# EAGLE board Capacitive (EAGLE 7.2.0)
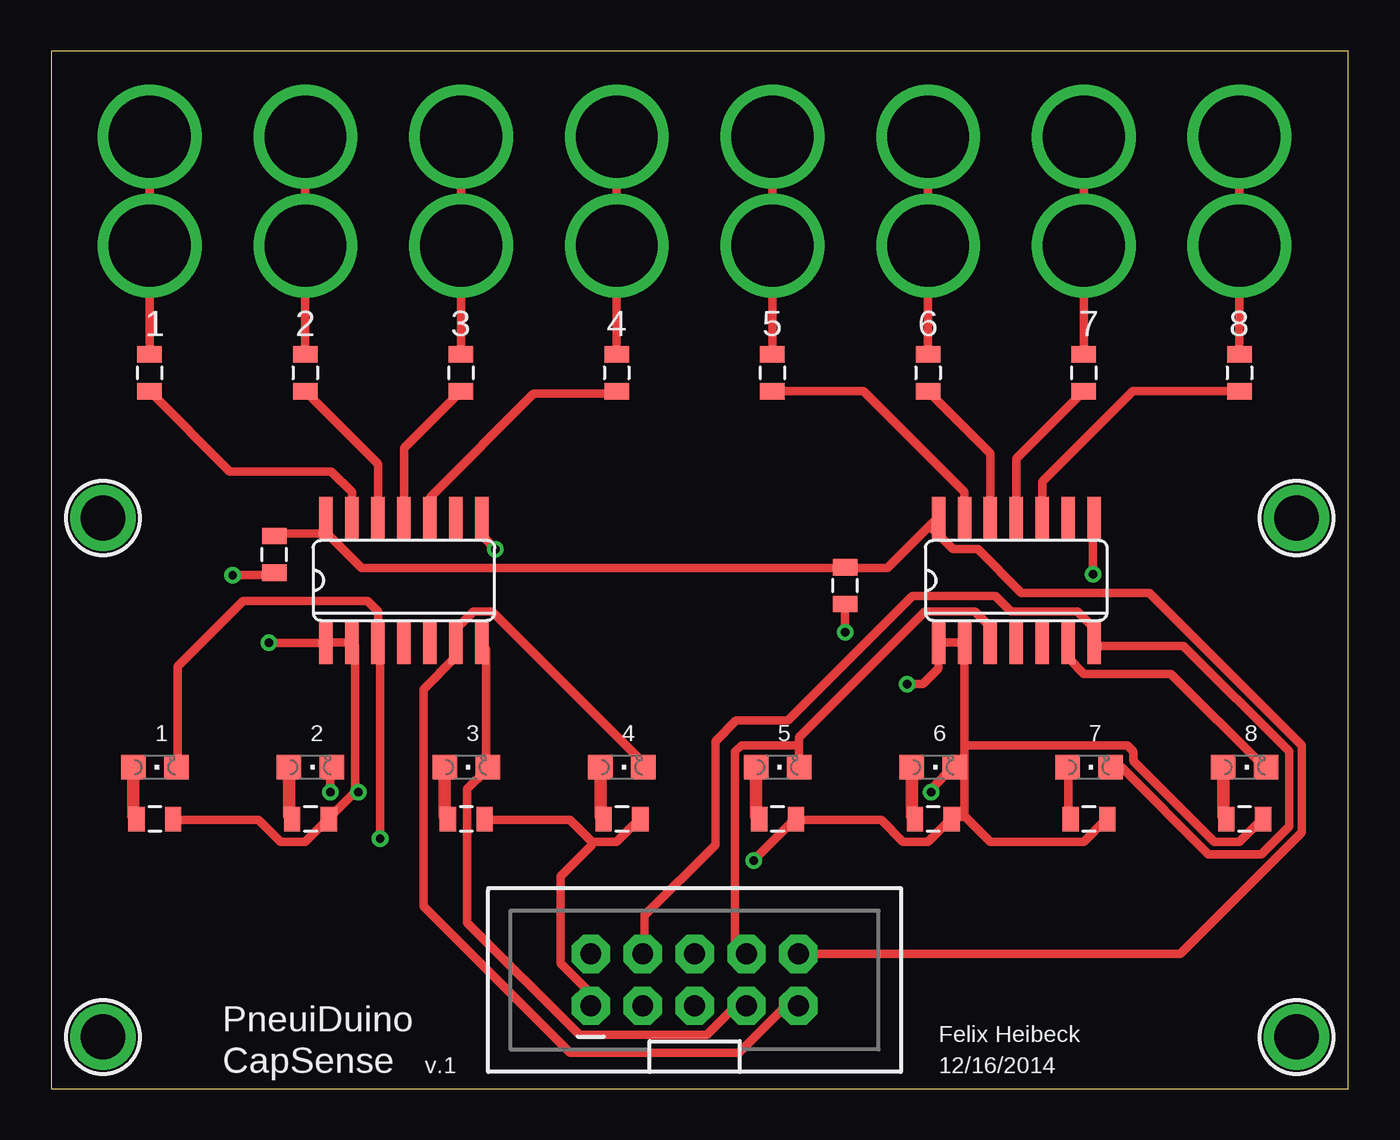
[diagram p0: board, top side]
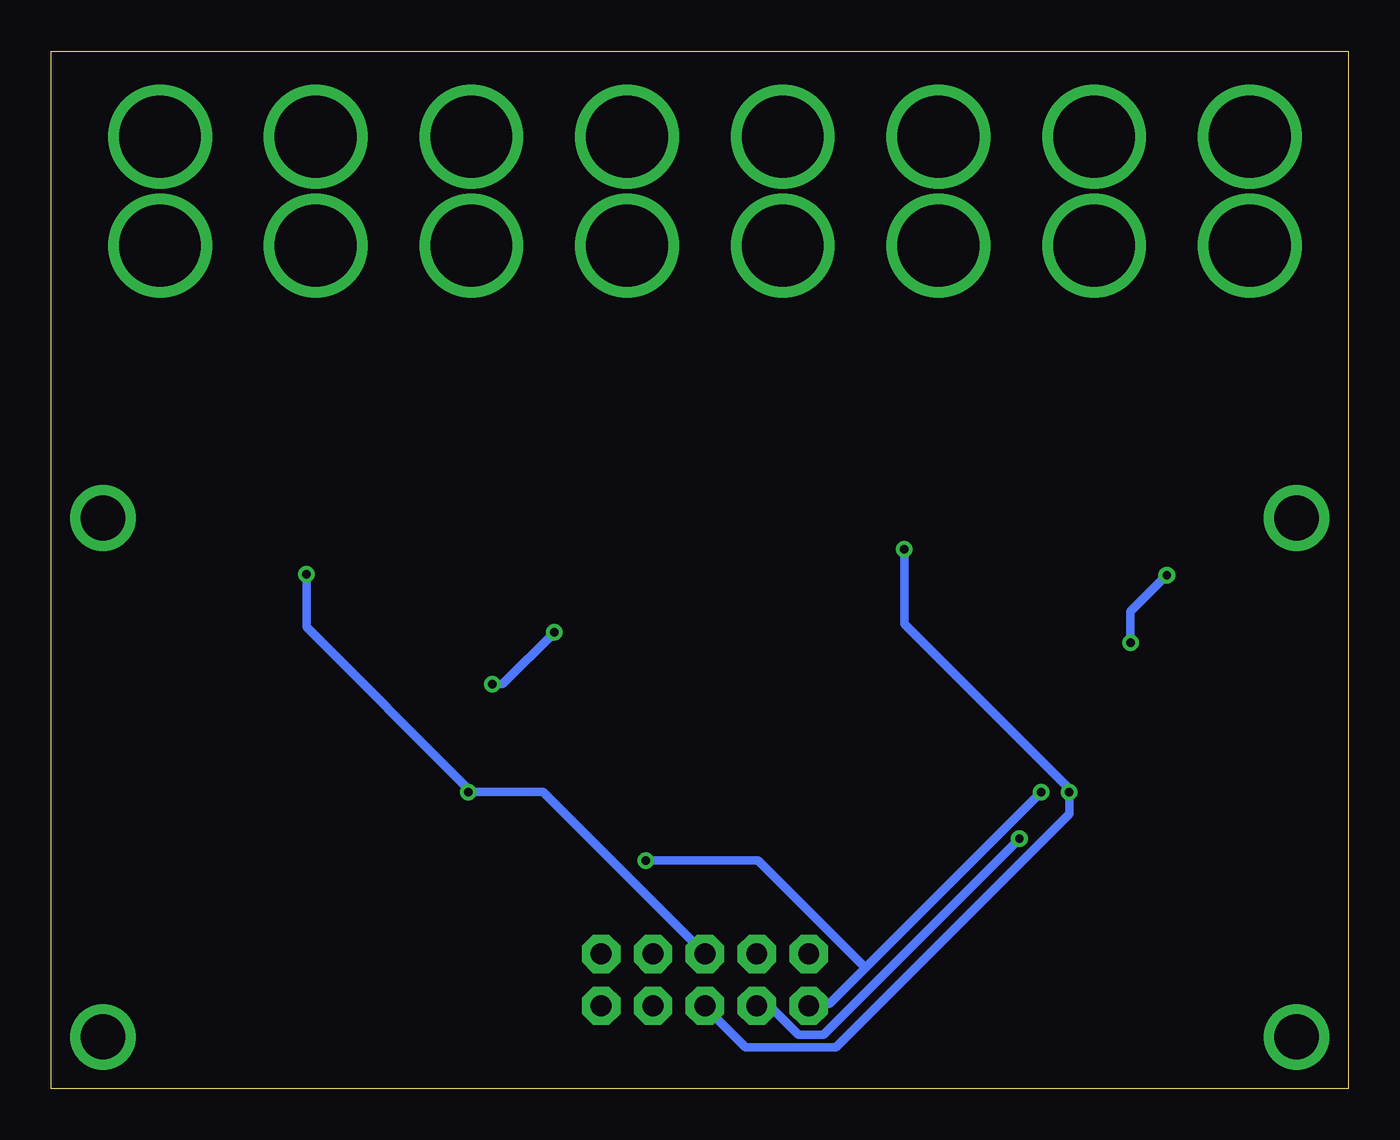
[diagram p1: board, bottom side, seen from below]

Size 63.5 x 50.8 mm. Coordinates in mm from the lower left corner, seen from the top.
Outline: 0,0 63.5,0 63.5,50.8 0,50.8 0,0
Copper layers (1*16): Top 0.035mm / dielectric 1.5mm / Bottom 0.035mm
Design rules "default *": minimum track width 16mil, minimum drill 16mil, track to track 8mil, track to pad 8mil, pad to pad 8mil, via to via 8mil, smd to smd 8mil, copper to edge 40mil, drill to drill 8mil, minimum pad ring 10mil, minimum via ring 8mil, stop-mask expansion 4mil, vias tented up to drill 16mil, thermal gap 10mil
Net classes: 0 default: width 0.203 mm; 1 vcc: width 0.254 mm

## Footprints (pad centres in the part's own frame; a part is rotated, then mirrored left to right if it is on the bottom)
CHIPLED_0805 = smd 1.2 x 1.2: A 0,-1.05; C 0,1.05
0805 = smd 0.8 x 1.2: 1 -0.9,0; 2 0.9,0
SO14 = smd 0.66 x 2.032: 1 -3.81,-3.073; 2 -2.54,-3.073; 3 -1.27,-3.073; 4 0,-3.073; 5 1.27,-3.073; 6 2.54,-3.073; 7 3.81,-3.073; 8 3.81,3.073; 9 2.54,3.073; 10 1.27,3.073; 11 0,3.073; 12 -1.27,3.073; 13 -2.54,3.073; 14 -3.81,3.073
2X5-SHROUDED = drill 1.016 pad 1.88 octagon: 1 -1.27,5.08; 2 1.27,5.08; 3 -1.27,2.54; 4 1.27,2.54; 5 -1.27,0; 6 1.27,0; 7 -1.27,-2.54; 8 1.27,-2.54; 9 -1.27,-5.08; 10 1.27,-5.08
3MM_ALLIGATOR = drill 4 pad 5.08: ALLIGATOR 2.667,0; ALLIGATOR1 -2.667,0
MOUNTINGHOLE_2.0_PLATED = drill 2.2 pad 3: P$1 0,0

## Placement (x,y rotation side)
1  [CHIPLED_0805]  5.08,15.75 270 top
2  [CHIPLED_0805]  12.7,15.75 270 top
3  [CHIPLED_0805]  20.32,15.75 270 top
4  [CHIPLED_0805]  27.94,15.75 270 top
5  [CHIPLED_0805]  35.56,15.75 270 top
6  [CHIPLED_0805]  43.18,15.75 270 top
7  [CHIPLED_0805]  50.8,15.75 270 top
8  [CHIPLED_0805]  58.42,15.75 270 top
C1  0.1uF  [0805]  10.92,26.16 90 top
C2  0.1uF  [0805]  38.86,24.64 90 top
IC1  AT42QT1070  [SO14]  17.27,24.89 0 top
IC2  AT42QT1070  [SO14]  47.24,24.89 0 top
JP4  M05X2SHD  [2X5-SHROUDED]  31.5,5.33 90 top
R1  470  [0805]  5.08,13.21 180 top
R2  470  [0805]  20.32,13.21 180 top
R3  470  [0805]  12.7,13.21 180 top
R4  470  [0805]  27.94,13.21 180 top
R5  470  [0805]  58.42,13.21 180 top
R6  470  [0805]  50.8,13.21 180 top
R7  470  [0805]  43.18,13.21 180 top
R8  470  [0805]  35.56,13.21 180 top
R9  10k  [0805]  4.83,35.05 270 top
R10  10k  [0805]  12.45,35.05 270 top
R11  10k  [0805]  20.07,35.05 270 top
R12  10k  [0805]  27.69,35.05 270 top
R13  10k  [0805]  35.31,35.05 270 top
R14  10k  [0805]  42.93,35.05 270 top
R15  10k  [0805]  50.55,35.05 270 top
R16  10k  [0805]  58.17,35.05 270 top
U$1  ALLIGATOR_CONN  [3MM_ALLIGATOR]  4.83,43.94 270 top
U$2  ALLIGATOR_CONN  [3MM_ALLIGATOR]  12.45,43.94 270 top
U$3  ALLIGATOR_CONN  [3MM_ALLIGATOR]  20.07,43.94 270 top
U$4  ALLIGATOR_CONN  [3MM_ALLIGATOR]  27.69,43.94 270 top
U$5  ALLIGATOR_CONN  [3MM_ALLIGATOR]  35.31,43.94 270 top
U$6  ALLIGATOR_CONN  [3MM_ALLIGATOR]  42.93,43.94 270 top
U$7  ALLIGATOR_CONN  [3MM_ALLIGATOR]  50.55,43.94 270 top
U$8  ALLIGATOR_CONN  [3MM_ALLIGATOR]  58.17,43.94 270 top
U$9  MOUNTINGHOLE2.0  [MOUNTINGHOLE_2.0_PLATED]  60.96,2.54 0 top
U$10  MOUNTINGHOLE2.0  [MOUNTINGHOLE_2.0_PLATED]  2.54,27.94 0 top
U$11  MOUNTINGHOLE2.0  [MOUNTINGHOLE_2.0_PLATED]  2.54,2.54 0 top
U$12  MOUNTINGHOLE2.0  [MOUNTINGHOLE_2.0_PLATED]  60.96,27.94 0 top

## Library data of the parts
1-8 IC1 IC2 = adafruit
C1 C2 = SparkFun-Passives
JP4 = SparkFun-Connectors
R1-R16 = SparkFun-Resistors
U$1-U$8 = digikey
U$9-U$12 = microbuilder; BOM: EXCLUDE

## Nets
5V: C1.1 C2.1 IC1.1 IC1.2 IC2.1 IC2.2 JP4.1 R1.1 R2.1 R3.1 R4.1 R5.1 R6.1 R7.1 R8.1
07: JP4.2
GND [vcc]: C1.2 C2.2 IC1.14 IC2.14 JP4.10
N$1: 1.A R1.2
N$2: 3.A R2.2
N$3: 2.A R3.2
N$4: 4.A R4.2
N$5: 8.A R5.2
N$6: 7.A R6.2
N$7: 6.A R7.2
N$8: 5.A R8.2
N$9: IC1.13 R9.2
N$10: IC1.12 R10.2
N$11: IC1.11 R11.2
N$12: IC1.10 R12.2
N$13: R12.1 U$4.ALLIGATOR U$4.ALLIGATOR1
N$14: R11.1 U$3.ALLIGATOR U$3.ALLIGATOR1
N$15: R10.1 U$2.ALLIGATOR U$2.ALLIGATOR1
N$16: R9.1 U$1.ALLIGATOR U$1.ALLIGATOR1
N$17: IC2.13 R13.2
N$18: IC2.12 R14.2
N$19: IC2.11 R15.2
N$20: IC2.10 R16.2
N$21: R14.1 U$6.ALLIGATOR U$6.ALLIGATOR1
N$22: R15.1 U$7.ALLIGATOR U$7.ALLIGATOR1
N$23: R16.1 U$8.ALLIGATOR U$8.ALLIGATOR1
N$24: R13.1 U$5.ALLIGATOR U$5.ALLIGATOR1
O0: 1.C IC1.3 JP4.3
O1: 2.C IC1.8 JP4.5
O2: 3.C IC1.7 JP4.7
O3: 4.C IC1.6 JP4.9
O4: 5.C IC2.3 JP4.8
O5: 6.C IC2.8 JP4.6
O6: 7.C IC2.7 JP4.4
O7: 8.C IC2.6

## Tracks (layer width: path | path; a pad name or v marks a point on that pad's centre or on a via)
5V  (via drill 0.41)
  Top 0.406: 44.7,13.34 44.7,16.82 | 44.7,16.82 IC2.2 44.6,21.84 43.54,21.84 IC2.1 43.43,20.57 42.67,19.81 v41.91,19.81 | R6.1 51.61,13.16 50.55,12.09 45.97,12.09 44.76,13.31 44.7,13.34 | 44.7,16.82 52.68,16.82 52.98,16.51 52.98,16.05 56.95,12.09 58.17,12.09 59.23,13.16 R5.1 | 44.7,13.34 44.6,13.31 44.15,13.31 R7.1 43.99,13.16 42.93,12.09 41.71,12.09 40.64,13.16 36.52,13.16 R8.1 36.37,13.16 v34.39,11.18 | 26.47,12.09 25.4,13.16 21.29,13.16 R2.1 | 26.47,12.09 27.69,12.09 28.75,13.16 R4.1 | JP4.1 26.31,4.17 26.31,4.78 24.94,6.15 24.94,10.41 26.47,11.94 26.47,12.09 | R1.1 6.04,13.16 10.16,13.16 11.23,12.09 12.45,12.09 13.51,13.16 R3.1 13.66,13.31 14.88,14.53 | 14.88,14.53 14.88,21.69 IC1.2 14.73,21.84 13.51,21.84 IC1.1 10.69,21.82 v10.67,21.84 | v15.04,14.53 14.88,14.53 | v38.86,22.35 C2.1 | v8.89,25.15 10.81,25.15 C1.1
  Bottom 0.406: v15.04,14.53 23.65,5.92 | 23.65,5.92 25.4,4.17 26.31,4.17 JP4.1 | v34.39,11.18 28.91,11.18 23.65,5.92 | v41.91,19.81 41.4,19.81 v38.86,22.35 | v10.67,21.84 10.67,23.37 v8.89,25.15
GND
  Top 0.406: 13.51,27.18 13.51,27.94 IC1.14 | 13.51,27.18 15.19,25.5 38.86,25.5 | 38.86,25.5 40.95,25.5 43,27.56 | 43,27.56 43.38,27.94 IC2.14 | JP4.10 55.27,6.6 61.21,12.55 61.21,16.82 53.75,24.28 47.5,24.28 45.36,26.42 44.15,26.42 43,27.56 | C2.2 38.86,25.5 | 13.51,27.18 11.04,27.18 C1.2
N$1
  Top 0.61: 1.A 4.03,13.36 R1.2
N$2
  Top 0.61: 3.A 19.27,13.36 R2.2
N$3
  Top 0.61: 2.A 11.65,13.36 R3.2
N$4
  Top 0.61: 4.A 26.89,13.36 R4.2
N$5
  Top 0.61: 8.A 57.37,13.36 R5.2
N$6
  Top 0.406: 7.A 49.78,15.75 49.78,13.31 R6.2
N$7
  Top 0.61: 6.A 42.13,13.36 R7.2
N$8
  Top 0.61: 5.A 34.51,13.36 R8.2
N$9
  Top 0.406: IC1.13 14.73,29.21 13.72,30.23 8.75,30.23 R9.2
N$10
  Top 0.406: IC1.12 16,30.6 R10.2
N$11
  Top 0.406: IC1.11 17.27,31.36 R11.2
N$12
  Top 0.406: IC1.10 18.54,28.96 23.62,34.04 27.57,34.04 R12.2
N$13
  Top 0.406: U$4.ALLIGATOR1 U$4.ALLIGATOR R12.1
N$14
  Top 0.406: U$3.ALLIGATOR1 U$3.ALLIGATOR R11.1
N$15
  Top 0.406: U$2.ALLIGATOR1 U$2.ALLIGATOR R10.1
N$16
  Top 0.406: U$1.ALLIGATOR1 U$1.ALLIGATOR R9.1
N$17
  Top 0.406: R13.2 39.76,34.15 44.7,29.21 IC2.13
N$18
  Top 0.406: IC2.12 45.97,31.1 R14.2
N$19
  Top 0.406: IC2.11 47.24,30.85 R15.2
N$20
  Top 0.406: R16.2 52.95,34.15 48.51,29.72 IC2.10
N$21
  Top 0.406: U$6.ALLIGATOR1 U$6.ALLIGATOR R14.1
N$22
  Top 0.406: U$7.ALLIGATOR1 U$7.ALLIGATOR R15.1
N$23
  Top 0.406: U$8.ALLIGATOR1 U$8.ALLIGATOR | U$8.ALLIGATOR 58.17,40.64 | R16.1 U$8.ALLIGATOR
N$24
  Top 0.406: U$5.ALLIGATOR1 U$5.ALLIGATOR R13.1
O0  (via drill 0.41)
  Top 0.406: 1.C 6.2,15.75 6.2,20.68 9.4,23.88 15.49,23.88 16,23.37 16,22.66 15.95,22.61 15.95,21.84 IC1.3 16.1,21.69 v16.1,12.24
  Bottom 0.406: v16.1,12.24 25.7,2.64 26.92,2.64 28.3,4.01 28.91,4.01 JP4.3
O1  (via drill 0.41)
  Top 0.406: v13.66,14.53 13.66,15.75 2.C | v21.74,26.42 21.13,27.03 21.13,27.94 IC1.8
  Bottom 0.406: JP4.5 31.5,4.01 29.52,2.03 25.09,2.03 13.66,13.46 v13.66,14.53 13.66,14.68 21.74,22.76 v21.74,26.42
O2
  Top 0.406: IC1.7 21.13,21.69 21.29,21.54 21.29,15.75 3.C 21.29,15.6 20.37,14.68 20.37,8.13 25.86,2.64 32.11,2.64 33.48,4.01 33.93,4.01 JP4.7
O3
  Top 0.406: 4.C 28.91,15.75 28.91,16.05 21.59,23.37 20.68,23.37 19.91,22.61 19.91,21.84 IC1.6 19.76,21.69 19.76,21.08 18.24,19.56 18.24,8.94 25.4,1.78 33.68,1.78 35.92,4.01 36.52,4.01 JP4.9
O4
  Top 0.406: 36.61,16.82 33.78,16.82 33.48,16.51 33.48,7.06 33.93,6.6 JP4.8 | 36.52,15.75 5.C 36.61,16.82 | IC2.3 45.97,22.61 45.21,23.37 42.77,23.37 36.61,17.2 36.61,16.82
O5  (via drill 0.41)
  Top 0.406: v43.08,14.53 43.08,14.68 44.15,15.75 6.C | v51,25.2 51,27.94 IC2.8
  Bottom 0.406: JP4.6 39.42,14.53 v43.08,14.53 43.08,14.68 51,22.61 v51,25.2
O6
  Top 0.406: 7.C 52.38,15.75 56.64,11.48 59.23,11.48 60.6,12.85 60.6,16.51 55.42,21.69 51.16,21.69 IC2.7 51,22 51,22.61 50.24,23.37 46.99,23.37 46.23,24.13 42.16,24.13 36.07,18.03 33.53,18.03 32.51,17.02 32.51,11.94 29.06,8.48 29.06,6.6 JP4.4
O7
  Top 0.406: IC2.6 49.78,21.08 50.55,20.32 54.81,20.32 59.38,15.75 8.C

## Text on the board
tPlace: 1 | 2 | 3 | 4 | 5 | 6 | 7 | 8 | PneuiDuino | Felix Heibeck | CapSense | v.1 | 12/16/2014